# Altium PCB trd4.PcbDoc
Units mil, origin at the board's own origin, x right, y up, seen from the top; angles counter-clockwise.
Board outline 6000 x 4000 mil, 2 copper layers (Top Layer, Bottom Layer); 73 components, 143 nets, 481 pads, 96 vias.
Unrouted connection lines stored in the file: 173.
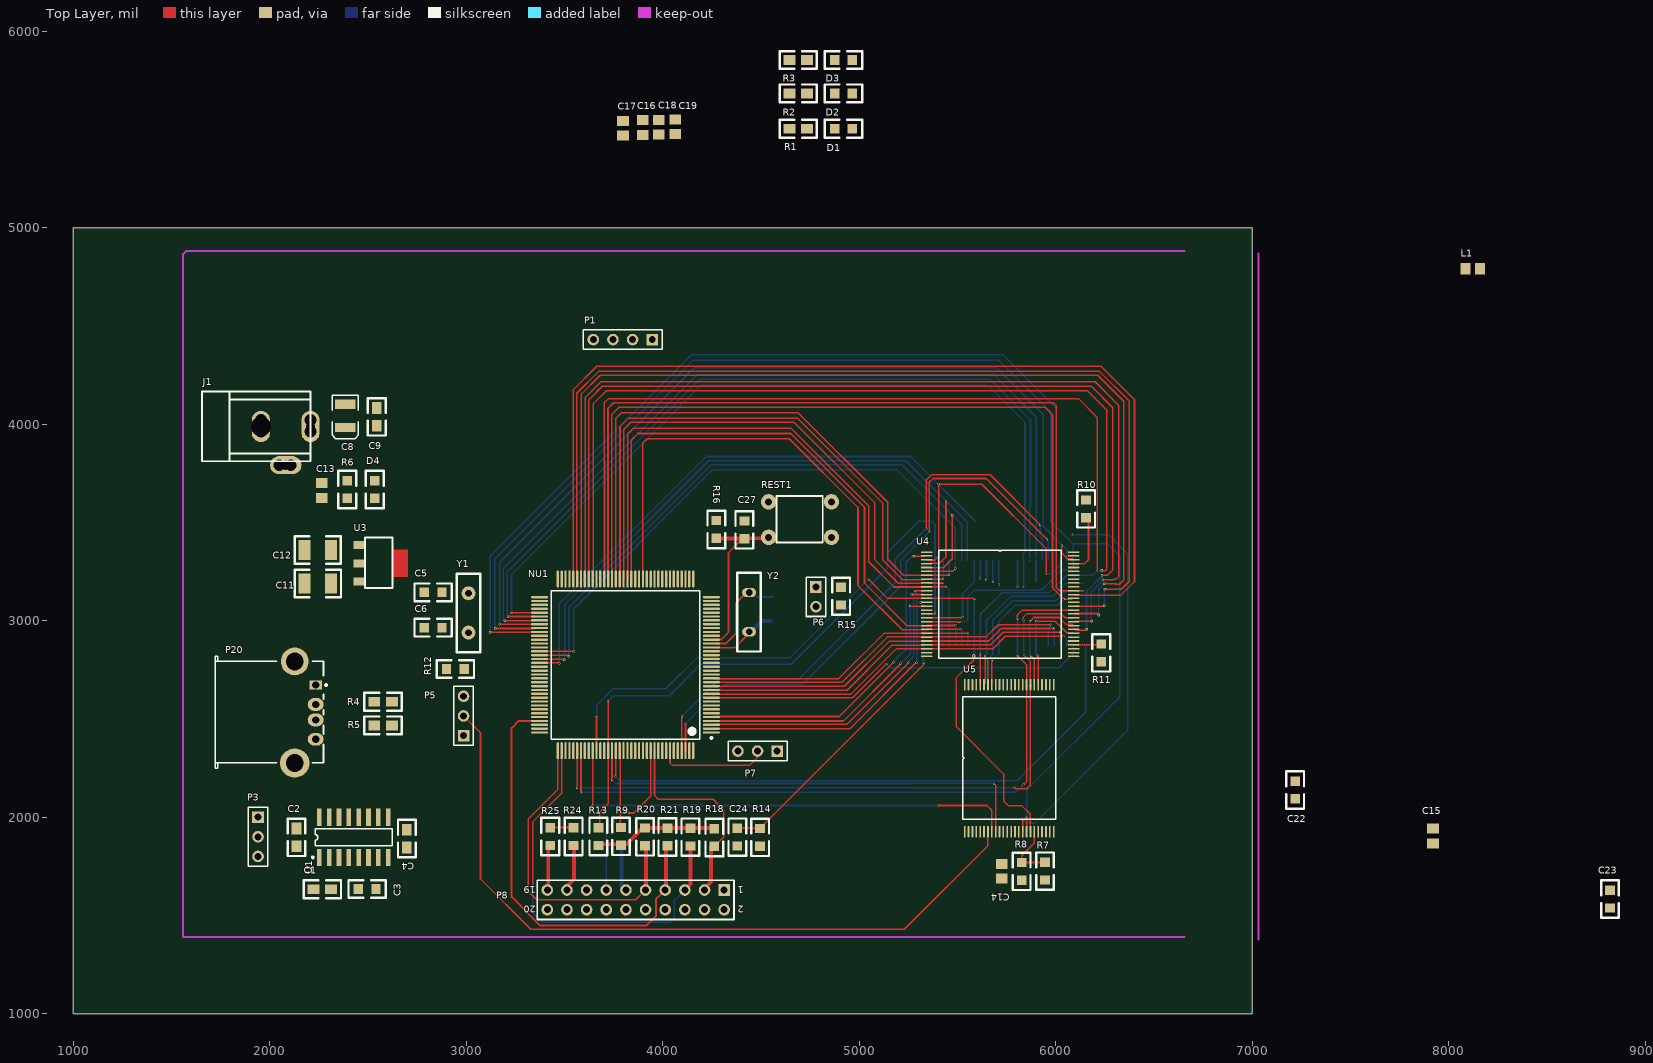
[diagram p0: Top Layer view]
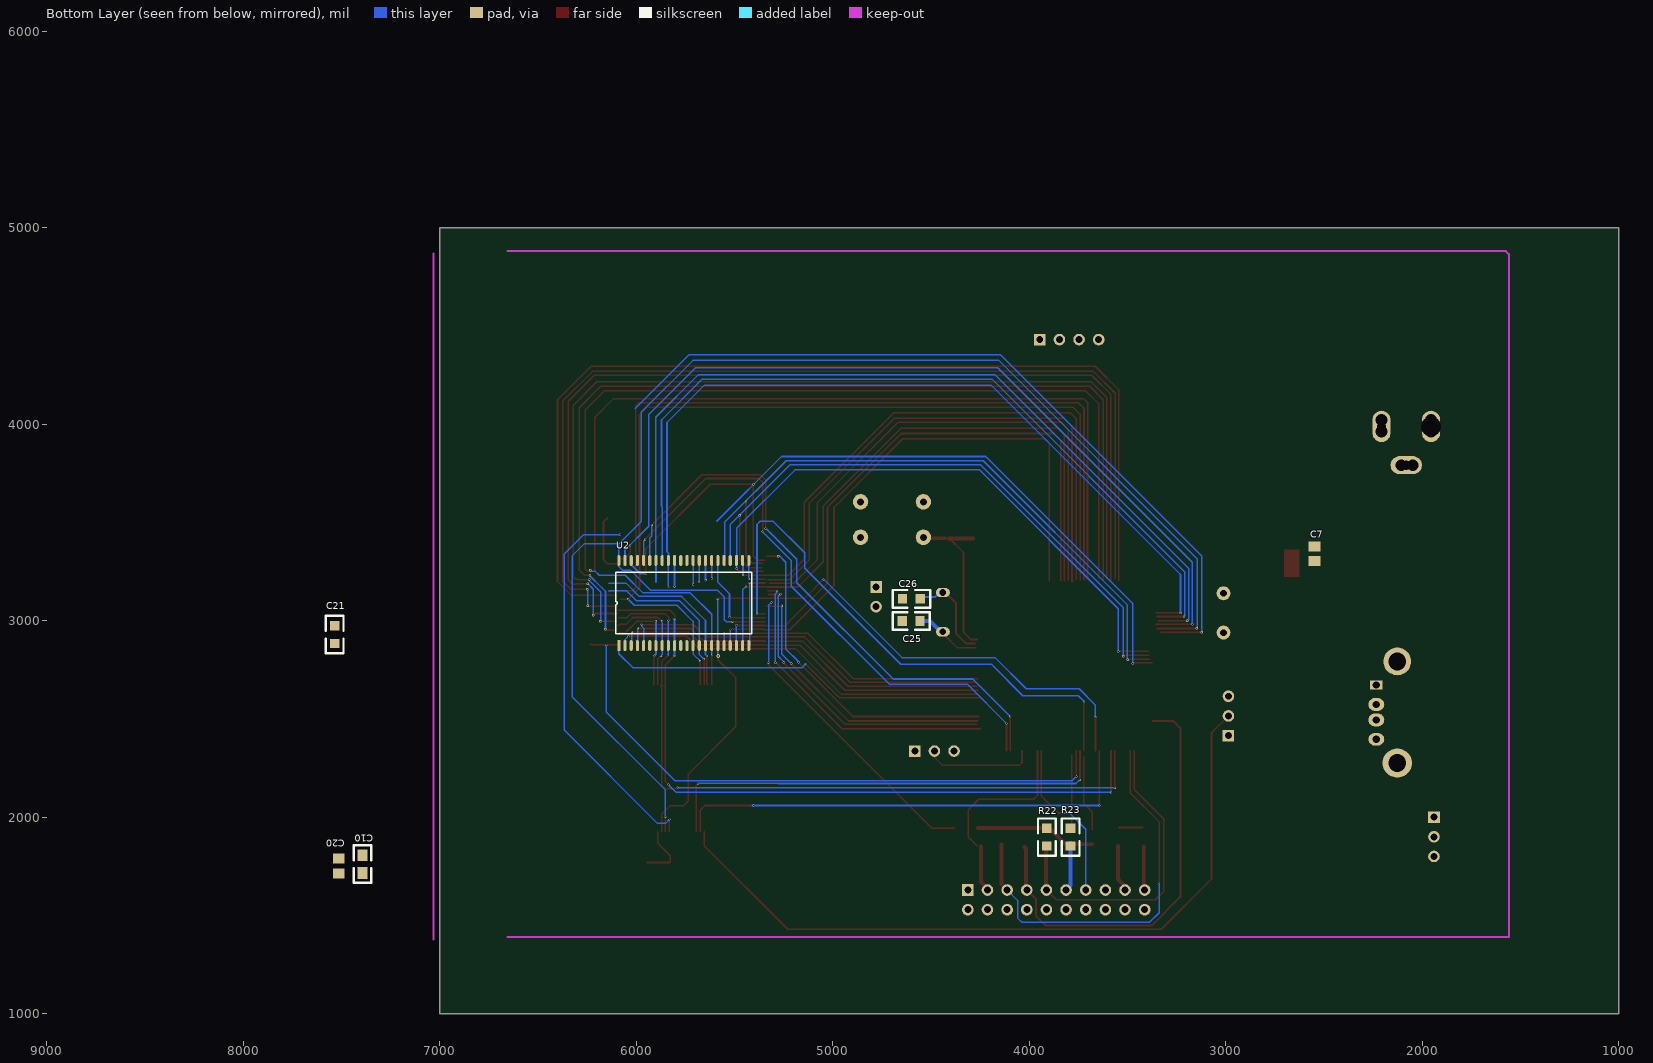
[diagram p1: Bottom Layer view, seen from below]

## Layer stack, top to bottom
Top Layer: signal copper 1.4
Dielectric: dielectric 12.6, FR-4, Dk 4.8
Bottom Layer: signal copper 1.4

## Board outline
1000,1000 7000,1000 7000,5000 1000,5000

## Design rules (kind name [scope] priority, off if disabled: settings)
Clearance [All] p1: gap=6
PolygonConnect [All] p1: connectstyle=Relief reliefconductorwidth=10 reliefentries=4 polygonreliefangle="90 Angle"
RoutingVias [All] p1: holewidth=28 width=50 viastyle="Through Hole" minholewidth=28 minwidth=50 maxholewidth=28 maxwidth=50
SilkscreenOverComponentPads [All] p1: minsilkscreentomaskgap=10
SolderMaskExpansion [All] p1: expansion=4
TestPointUsage [All] p1: valid=0 allowmultiple=FALSE
Testpoint [All] p1: side=15 testpointundercomponent=TRUE minsize=40 maxsize=100 preferedsize=60 minholesize=0 maxholesize=40 preferedholesize=32 testpointgrid=1 style=1023 order=0123456789
Width [All] p1: maxlimit=50 minlimit=6 preferedwidth=10 minimp=50.000000 maximp=50.000000 favimp=50.000000
23 further rules are at their usual default settings.

## Classes and differential pairs
net class R19_Nets: PA15 VDD33
net class U4_Nets: A0 A1 A2 A3 A4 A5 A6 A7 A8 A9 A10 A11 A12 A13 A14 A15 A16 A17 A18 A19 A20 A21 A22 D0 D1 D2 D3 D4 D5 D6 D7 D8 D9 D10 D11 D12 D13 D14 D15 GND NetC24_1 NetP6_2 NetR10_1 NetU4_1 NetU4_27 NetU4_28 NetU4_30 NetU4_55 NetU4_56 PD4 PD5 PD6 PG9 VDD33
net class D[0..15]: AD0 AD1 AD2 AD3 AD4 AD5 AD6 AD7 AD8 AD9 AD10 AD11 AD12 AD13 AD14 AD15 AD16 AD17 AD18 AD19 AD20 AD21 AD22 AD23 D0 D1 D2 D3 D4 D5 D6 D7 D8 D9 D10 D11 D12 D13 D14 D15 DATA0 DATA1 DATA2 DATA3 DATA4 DATA5 DATA6 DATA7 DATA8 DATA9 DATA10 DATA11 DATA12 DATA13 DATA14 DATA15 NetU4_1 NetU4_27 NetU4_28 NetU4_30 NetU4_55 NetU4_56
net class Y1_Nets: PB14 PB15
net class U5_Nets: A16 A17 D0 D1 D2 D3 D4 D5 D6 D7 GND NetP5_2 NetR7_1 PD4 PD5 PD7 VDD33
net class A[0..23]: A0 A1 A2 A3 A4 A5 A6 A7 A8 A9 A10 A11 A12 A13 A14 A15 A16 A17 A18 A19 A20 A21 A22 A23 NetU4_1 NetU4_27 NetU4_28 NetU4_30 NetU4_55 NetU4_56
net class U3_Nets: GND VDD5 VDD33
net class U2_Nets: A0 A1 A2 A3 A4 A5 A6 A7 A8 A9 A10 A11 A12 A13 A14 A15 A16 A17 A18 D0 D1 D2 D3 D4 D5 D6 D7 D8 D9 D10 D11 D12 D13 D14 D15 GND PD4 PD5 PE0 PE1 PG10 VDD33
net class REST1_Nets: GND NRST
net class R25_Nets: GND NetP8_19
net class R24_Nets: GND NetP8_17
net class R23_Nets: GND NetP8_11
net class R22_Nets: GND PA14
net class R21_Nets: PA13 VDD33
net class R20_Nets: PA14 VDD33
net class R18_Nets: PB4 VDD33
net class R16_Nets: NRST VDD33
net class R15_Nets: NetP6_2 VDD33
net class R14_Nets: NetC24_1 VDD33
net class R13_Nets: PD6 VDD33
net class R12_Nets: PG6 VDD33
net class R11_Nets: PG9 VDD33
net class R10_Nets: NetR10_1 VDD33
net class R9_Nets: PG10 VDD33
net class R8_Nets: NetR7_1 VDD33
net class R7_Nets: GND NetR7_1
net class R6_Nets: NetD4_1 VDD33
net class R5_Nets: NetP20_3 PA12
net class R4_Nets: NetP20_2 PA11
net class R3_Nets: LED2 NetD3_2
net class R2_Nets: LED1 NetD2_2
net class R1_Nets: LED0 NetD1_2
net class P20_Nets: GND NetP20_2 NetP20_3 NetP20_5 NetP20_6 "USB 5V"
net class P8_Nets: GND NetP8_11 NetP8_17 NetP8_19 NRST PA13 PA14 PA15 PB3 PB4 VDD33
net class P7_Nets: BOOT0 GND VDD33
net class P6_Nets: GND NetP6_2
net class P5_Nets: NetP5_2 PD6 PG6
net class P3_Nets: GND R1IN T1OUT
net class P1_Nets: PA5 PA6 PA7 PA8
net class NU1_Nets: A0 A1 A2 A3 A4 A5 A6 A7 A8 A9 A10 A11 A12 A13 A14 A15 A16 A17 A18 A19 A20 A21 A22 A23 BOOT0 D0 D1 D2 D3 D4 D5 D6 D7 D8 D9 D10 D11 D12 D13 D14 D15 GND LED0 LED1 LED2 NetL1_1 NetNU1_6 NetNU1_106 NRST OSCIN OSCOUT PA0 PA1 PA2 PA3 PA4 PA5 PA6 PA7 PA8 PA9 PA10 PA11 PA12 PA13 PA14 PA15 PB0 PB1 PB2 PB3 PB4 PB5 PB6 PB7 PB8 PB9 PB10 PB11 PB12 PB13 PB14 PB15 PC0 PC1 PC2 PC3 PC4 PC5 PC6 PC7 PC8 PC9 PC10 PC11 PC12 PC13 PC14 PC15 PD2 PD3 PD4 PD5 PD6 PD7 PE0 PE1 PF6 PF10 PF11 PG6 PG7 PG8 PG9 PG10 PG11 PG12 PG13 PG14 PG15 VDD33
net class L1_Nets: NetL1_1 VDD33
net class J1_Nets: GND VDD5
net class D4_Nets: GND NetD4_1
net class D3_Nets: NetD3_2 VDD33
net class D2_Nets: NetD2_2 VDD33
net class D1_Nets: NetD1_2 VDD33
net class C27_Nets: GND NRST
net class C25_Nets: GND OSCIN
net class C24_Nets: GND NetC24_1
net class C23_Nets: GND VDD33
net class C22_Nets: GND VDD33
net class C21_Nets: GND VDD33
net class C20_Nets: GND VDD33
net class C19_Nets: GND VDD33
net class C18_Nets: GND VDD33
net class C17_Nets: GND VDD33
net class C16_Nets: GND VDD33
net class C15_Nets: GND VDD33
net class C14_Nets: GND VDD33
net class C13_Nets: GND VDD5
net class C12_Nets: GND VDD33
net class C11_Nets: GND VDD5
net class C10_Nets: GND VDD33
net class C9_Nets: GND VDD5
net class C8_Nets: GND VDD5
net class C7_Nets: GND VDD33
net class C6_Nets: GND PB15
net class C5_Nets: GND PB14
net class C3_Nets: NetC3_1 NetC3_2
net class C1_Nets: NetC1_1 NetC1_2
component class "XLAT AND JTAG": C25 C26 C27 P7 P8 R16 R18 R19 R20 R21 R22 R23 R24 R25 REST1 Y2
component class STORAGE: C21 C22 C23 C24 P5 P6 R7 R8 R9 R10 R11 R12 R13 R14 R15 U2 U4 U5
component class POWER: C7 C8 C9 C10 C11 C12 C13 C14 C15 C16 C17 C18 C19 C20 D4 J1 L1 NU1 R6 U3
component class GPIO_OUT: C5 C6 Y1
component class EXTERN: 1 C1 C2 C3 C4 D1 D2 D3 P1 P3 P20 R1 R2 R3 R4 R5 U1
net class C2_Nets: NetC2_2 VDD5
net class C4_Nets: GND NetC4_1
net class U1_Nets: GND NetC1_1 NetC1_2 NetC2_2 NetC3_1 NetC3_2 NetC4_1 NetU1_7 NetU1_8 NetU1_9 NetU1_10 PA9 PA10 R1IN T1OUT VDD5
net class C26_Nets: GND OSCOUT
net class Y2_Nets: OSCIN OSCOUT

## Components (designator, comment, footprint, x,y, rotation, side; value= is the part's Value field where it differs from the comment)
C1 "0.1uF" 0805#1 2223,1633 r0 top
C2 "0.1uF" 0805#1 2137,1942 r270 top
C3 "0.1uF" 0805#2 2541,1634 r180 top
C4 "0.1uF" 0805#1 2698,1846 r90 top
C5 "Cap" 0805#2 2787,3144 r0 top
C6 "Cap" 0805#2 2787,2964 r0 top
C7 "Cap" 6-0805 2549,3340 r270 bottom
C8 "Cap Pol2" 3.5X2.8X1.9 2385,4042 r270 top
C9 "102" 0805#1 2545,4082 r270 top
C10 "102" 0805#1 7393,1806 r270 bottom
C11 "2.2uf" 1210 2313,3189 r180 top
C12 "2.2uf" 1210 2312,3359 r180 top
C13 "Cap" 6-0805 2265,3662 r90 top
C14 "Cap" 6-0805 5725,1725 r90 top
C15 "Cap" 6-0805 7920,1904 r90 top
C16 "Cap" 6-0805 3898,5509 r270 top
C17 "Cap" 6-0805 3798,5505 r270 top
C18 "Cap" 6-0805 3981,5511 r270 top
C19 "Cap" 6-0805 4065,5513 r270 top
C20 "Cap" 6-0805 7514,1751 r90 bottom
C21 "Cap" 0805#2 7535,2974 r270 bottom
C22 "Cap" 0805#2 7219,2183 r270 top
C23 "Cap" 0805#2 8821,1628 r270 top
C24 "Cap" 0805#2 4380,1943 r270 top
C25 "Cap" 0805#2 4646,2998 r180 bottom
C26 "Cap" 0805#2 4645,3111 r180 bottom
C27 "Cap" 0805#2 4416,3507 r270 top
D1 "LED0" 0805#2 4965,5503 r180 top
D2 "LED0" 0805#2 4965,5683 r180 top
D3 "LED0" 0805#2 4965,5853 r180 top
D4 "LED3" 0805#2 2535,3712 r270 top
J1 "PWR2.5" Power_In 1938,4078 r0 top
L1 "Inductor" 6-0805 8122,4790 r0 top
NU1 "STM32F103ZET6" LQFN144 3811,2775 r180 top
P1 "Header 4" HDR1X4 3947,4430 r180 top
P3 "Header 3" HDR1X3 1941,2000 r270 top
P5 "Header 3" HDR1X3 2987,2415 r90 top
P6 "Header 2" HDR1X2 4780,3171 r270 top
P7 "Header 3" HDR1X3 4583,2336 r180 top
P8 "Header 10X2" HDR2X10 4313,1629 r180 top
P20 "P10" 787616 1723,2534 r180 top
R1 "Res2" 0805#1 4645,5503 r0 top
R2 "Res2" 0805#1 4645,5683 r0 top
R3 "Res2" 0805#1 4645,5853 r0 top
R4 "Res2" 0805#1 2532,2587 r0 top
R5 "Res2" 0805#1 2532,2467 r0 top
R6 "Res2" 0805#2 2395,3712 r270 top
R7 "Res2" 0805#2 5946,1770 r270 top
R8 "Res2" 0805#2 5827,1679 r90 top
R9 "Res2" 0805#2 3788,1947 r270 top
R10 "Res2" 0805#2 6155,3524 r90 top
R11 "Res2" 0805#2 6232,2881 r270 top
R12 "Res2" 0805#2 2990,2754 r180 top
R13 "Res2" 0805#2 3673,1856 r90 top
R14 "Res2" 0805#2 4496,1852 r90 top
R15 "Res2" 0805#2 4908,3169 r270 top
R16 "Res2" 0805#2 4273,3419 r90 top
R18 "Res2" 0805#2 4263,1851 r90 top
R19 "Res2" 0805#2 4141,1853 r90 top
R20 "Res2" 0805#2 3910,1855 r90 top
R21 "Res2" 0805#2 4024,1854 r90 top
R22 "Res2" 0805#2 3911,1853 r90 bottom
R23 "Res2" 0805#2 3790,1853 r90 bottom
R24 "Res2" 0805#2 3547,1856 r90 top
R25 "Res2" 0805#2 3428,1856 r90 top
REST1 "SW_PB" SWPB 4859,3604 r0 top
U1 "MAX232-2" SOIC16 2428,1897 r0 top
U2 "IS61LV51216-10T" TSOP44 6089,2873 r90 bottom
U3 "LM1117-3.3" SOT-223 2625,3422 r270 top
U4 "M29W128GL" TSOP56 5343,3349 r0 top
U5 "NAND512W3A2CN6E" TSOP48 5537,1926 r90 top
Y1 "XTAL" XTAL-1#1 3012,2939 r90 top
Y2 "XTAL" XTAL-1#2 4440,3143 r270 top

## Footprints (in the part's own frame and the unit in brackets; to place one, negate y for a bottom-side part, rotate by r counter-clockwise, add the part's x,y. Pads: shape width x height; smd on the part's side, far side on the other; paste and mask are expansions set on the pad)
3.5X2.8X1.9 [mm] "SM LED; 2 C-Bend Leads; Body 3.5 x 2.8 x 1.9 mm, inc leads (LxWxH typ)"
  rect 1.203x2.6 smd: 1(-1.5,0) 2(1.5,0)
  silkscreen extent -2.65,-1.7 2.95,1.7
6-0805 [mm] "Chip Resistor; Body 2.0 x 1.3 mm (LxW typ)"
  rect 1.3x1.5 smd: 1(-0.95,0) 2(0.95,0)
0805#1 [mil]
  rect 60x50 smd: 1(0,0) 2(90,0)
  silkscreen extent -50,-45 140,45
0805#2 [mil]
  rect 47.37x50 smd: 1(0,0) 2(90,0)
  silkscreen extent -50,-45 140,45
1210 [mil]
  rect 60x100 smd: 1(0,0) 2(135,0)
  silkscreen extent -50,-70 185,70
787616 [mm] "Connector; USB1.1, Type A, Thru-Hole; 4 Position; Right Angle"
  rect 1.606x1.2 hole 0.92: 1(-12.99,-3.5)
  oval 2.057x1.676 hole 0.92: 2(-12.99,-1) 3(-12.99,1)
  oval 2.057x1.6 hole 0.92: 4(-12.99,3.5)
  round 3.8 hole 2.3: 5(-10.28,6.57)
  round 3.6 hole 2.3: 6(-10.28,-6.57)
  silkscreen extent -14.47,-7.25 0,7.25
HDR1X2 [mm] "Connector; Header; 2 Position"
  rect 1.5x1.5 hole 0.9: 1(0,0)
  round 1.5 hole 0.9: 2(2.54,0)
  silkscreen extent -1.27,-1.27 3.81,1.27
HDR1X3 [mm] "Connector; Header; 3 Position"
  rect 1.5x1.5 hole 0.9: 1(0,0)
  round 1.5 hole 0.9: 2(2.54,0) 3(5.08,0)
  silkscreen extent -1.27,-1.27 6.35,1.27
HDR1X4 [mm] "Connector; Header; 4 Position"
  rect 1.5x1.5 hole 0.9: 1(0,0)
  round 1.5 hole 0.9: 2(2.54,0) 3(5.08,0) 4(7.62,0)
  silkscreen extent -1.27,-1.27 8.89,1.27
HDR2X10 [mm] "Connector; Header; 10x2 Position"
  rect 1.5x1.5 hole 0.9: 1(0,0)
  round 1.5 hole 0.9: 2(0,2.54) 3(2.54,0) 4(2.54,2.54) 5(5.08,0) 6(5.08,2.54) 7(7.62,0) 8(7.62,2.54) 9(10.16,0) 10(10.16,2.54) 11(12.7,0) 12(12.7,2.54) 13(15.24,0) 14(15.24,2.54) 15(17.78,0) 16(17.78,2.54) 17(20.32,0) 18(20.32,2.54) 19(22.86,0) 20(22.86,2.54)
  silkscreen extent -1.27,-1.27 24.13,3.81
LQFN144 [mm] "TSQFP, 144-Leads, Body 23.8x23.8mm (max), Pitch 0.50mm, IPC Medium Density"
  oval 2.2x0.3 smd: 1(-11.1,8.75) 2(-11.1,8.25) 3(-11.1,7.75) 4(-11.1,7.25) 5(-11.1,6.75) 6(-11.1,6.25) 7(-11.1,5.75) 8(-11.1,5.25) 9(-11.1,4.75) 10(-11.1,4.25) 11(-11.1,3.75) 12(-11.1,3.25) 13(-11.1,2.75) 14(-11.1,2.25) 15(-11.1,1.75) 16(-11.1,1.25) 17(-11.1,0.75) 18(-11.1,0.25) 19(-11.1,-0.25) 20(-11.1,-0.75) 21(-11.1,-1.25) 22(-11.1,-1.75) 23(-11.1,-2.25) 24(-11.1,-2.75) 25(-11.1,-3.25) 26(-11.1,-3.75) 27(-11.1,-4.25) 28(-11.1,-4.75) 29(-11.1,-5.25) 30(-11.1,-5.75) 31(-11.1,-6.25) 32(-11.1,-6.75) 33(-11.1,-7.25) 34(-11.1,-7.75) 35(-11.1,-8.25) 36(-11.1,-8.75) 73(11.1,-8.75) 74(11.1,-8.25) 75(11.1,-7.75) 76(11.1,-7.25) 77(11.1,-6.75) 78(11.1,-6.25) 79(11.1,-5.75) 80(11.1,-5.25) 81(11.1,-4.75) 82(11.1,-4.25) 83(11.1,-3.75) 84(11.1,-3.25) 85(11.1,-2.75) 86(11.1,-2.25) 87(11.1,-1.75) 88(11.1,-1.25) 89(11.1,-0.75) 90(11.1,-0.25) 91(11.1,0.25) 92(11.1,0.75) 93(11.1,1.25) 94(11.1,1.75) 95(11.1,2.25) 96(11.1,2.75) 97(11.1,3.25) 98(11.1,3.75) 99(11.1,4.25) 100(11.1,4.75) 101(11.1,5.25) 102(11.1,5.75) 103(11.1,6.25) 104(11.1,6.75) 105(11.1,7.25) 106(11.1,7.75) 107(11.1,8.25) 108(11.1,8.75)
  oval 0.3x2.2 smd: 37(-8.75,-11.1) 38(-8.25,-11.1) 39(-7.75,-11.1) 40(-7.25,-11.1) 41(-6.75,-11.1) 42(-6.25,-11.1) 43(-5.75,-11.1) 44(-5.25,-11.1) 45(-4.75,-11.1) 46(-4.25,-11.1) 47(-3.75,-11.1) 48(-3.25,-11.1) 49(-2.75,-11.1) 50(-2.25,-11.1) 51(-1.75,-11.1) 52(-1.25,-11.1) 53(-0.75,-11.1) 54(-0.25,-11.1) 55(0.25,-11.1) 56(0.75,-11.1) 57(1.25,-11.1) 58(1.75,-11.1) 59(2.25,-11.1) 60(2.75,-11.1) 61(3.25,-11.1) 62(3.75,-11.1) 63(4.25,-11.1) 64(4.75,-11.1) 65(5.25,-11.1) 66(5.75,-11.1) 67(6.25,-11.1) 68(6.75,-11.1) 69(7.25,-11.1) 70(7.75,-11.1) 71(8.25,-11.1) 72(8.75,-11.1) 109(8.75,11.1) 110(8.25,11.1) 111(7.75,11.1) 112(7.25,11.1) 113(6.75,11.1) 114(6.25,11.1) 115(5.75,11.1) 116(5.25,11.1) 117(4.75,11.1) 118(4.25,11.1) 119(3.75,11.1) 120(3.25,11.1) 121(2.75,11.1) 122(2.25,11.1) 123(1.75,11.1) 124(1.25,11.1) 125(0.75,11.1) 126(0.25,11.1) 127(-0.25,11.1) 128(-0.75,11.1) 129(-1.25,11.1) 130(-1.75,11.1) 131(-2.25,11.1) 132(-2.75,11.1) 133(-3.25,11.1) 134(-3.75,11.1) 135(-4.25,11.1) 136(-4.75,11.1) 137(-5.25,11.1) 138(-5.75,11.1) 139(-6.25,11.1) 140(-6.75,11.1) 141(-7.25,11.1) 142(-7.75,11.1) 143(-8.25,11.1) 144(-8.75,11.1)
  silkscreen extent -11.23,-9.6 9.6,9.6, body extent -10,-10 10,10, height 1.6
Power_In [mil]
  rect 60x60 hole 60: 1(270,-116) 2(170,-287) 3(18,-57)
  oval 92x160 hole 47: 1(270,-90)
  rect 50x60 hole 60: 1(270,-57) 3(18,-116)
  rect 60x50 hole 60: 2(111,-287)
  oval 160x92 hole 47: 2(144,-287)
  oval 92x160 hole 100: 3(18,-90)
  silkscreen extent -281,-267 270,87
SOIC16 [mm]
  rect 0.6x2.2 smd: 1(-4.445,-2.6) 2(-3.175,-2.6) 3(-1.905,-2.6) 4(-0.635,-2.6) 5(0.635,-2.6) 6(1.905,-2.6) 7(3.175,-2.6) 8(4.445,-2.6) 9(4.445,2.6) 10(3.175,2.6) 11(1.905,2.6) 12(0.635,2.6) 13(-0.635,2.6) 14(-1.905,2.6) 15(-3.175,2.6) 16(-4.445,2.6)
  silkscreen extent -5.42,-2.72 5,1.1
SOT-223 [mm]
  rect 1x1.5 smd: 1(0.95,-4.31) 2(3.35,-4.31) 3(5.65,-4.31)
  Top Layer region: 1.524,0 5.08,0 5.08,2.032 1.524,2.032
  silkscreen extent 0,-3.56 6.5,0
SWPB [mm]
  round 2 hole 0.9: 1(-8.128,0) 2(-8.128,-4.572) 3(0,-4.572) 4(0,0)
  silkscreen extent -7.13,-5.25 -1.13,0.75
TSOP44 [mm]
  rect 1.4x0.4 smd: 1(0,0)
  oval 1.4x0.4 smd: 2(0,-0.8) 3(0,-1.6) 4(0,-2.4) 5(0,-3.2) 6(0,-4) 7(0,-4.8) 8(0,-5.6) 9(0,-6.4) 10(0,-7.2) 11(0,-8) 12(0,-8.8) 13(0,-9.6) 14(0,-10.4) 15(0,-11.2) 16(0,-12) 17(0,-12.8) 18(0,-13.6) 19(0,-14.4) 20(0,-15.2) 21(0,-16) 22(0,-16.8) 23(11,-16.8) 24(11,-16) 25(11,-15.2) 26(11,-14.4) 27(11,-13.6) 28(11,-12.8) 29(11,-12) 30(11,-11.2) 31(11,-10.4) 32(11,-9.6) 33(11,-8.8) 34(11,-8) 35(11,-7.2) 36(11,-6.4) 37(11,-5.6) 38(11,-4.8) 39(11,-4) 40(11,-3.2) 41(11,-2.4) 42(11,-1.6) 43(11,-0.8) 44(11,0)
  silkscreen extent 1.53,-17.2 9.47,0.4
TSOP48 [mm]
  rect 1.5x0.22 smd: 1(0,0)
  oval 1.5x0.22 smd: 2(0,-0.5) 3(0,-1) 4(0,-1.5) 5(0,-2) 6(0,-2.5) 7(0,-3) 8(0,-3.5) 9(0,-4) 10(0,-4.5) 11(0,-5) 12(0,-5.5) 13(0,-6) 14(0,-6.5) 15(0,-7) 16(0,-7.5) 17(0,-8) 18(0,-8.5) 19(0,-9) 20(0,-9.5) 21(0,-10) 22(0,-10.5) 23(0,-11) 24(0,-11.5) 25(19,-11.5) 26(19,-11) 27(19,-10.5) 28(19,-10) 29(19,-9.5) 30(19,-9) 31(19,-8.5) 32(19,-8) 33(19,-7.5) 34(19,-7) 35(19,-6.5) 36(19,-6) 37(19,-5.5) 38(19,-5) 39(19,-4.5) 40(19,-4) 41(19,-3.5) 42(19,-3) 43(19,-2.5) 44(19,-2) 45(19,-1.5) 46(19,-1) 47(19,-0.5) 48(19,0)
  silkscreen extent 1.58,-11.75 17.42,0.25
TSOP56 [mm]
  rect 1.5x0.2 smd: 1(0,0)
  oval 1.5x0.2 smd: 2(0,-0.5) 3(0,-1) 4(0,-1.5) 5(0,-2) 6(0,-2.5) 7(0,-3) 8(0,-3.5) 9(0,-4) 10(0,-4.5) 11(0,-5) 12(0,-5.5) 13(0,-6) 14(0,-6.5) 15(0,-7) 16(0,-7.5) 17(0,-8) 18(0,-8.5) 19(0,-9) 20(0,-9.5) 21(0,-10) 22(0,-10.5) 23(0,-11) 24(0,-11.5) 25(0,-12) 26(0,-12.5) 27(0,-13) 28(0,-13.5) 29(19,-13.5) 30(19,-13) 31(19,-12.5) 32(19,-12) 33(19,-11.5) 34(19,-11) 35(19,-10.5) 36(19,-10) 37(19,-9.5) 38(19,-9) 39(19,-8.5) 40(19,-8) 41(19,-7.5) 42(19,-7) 43(19,-6.5) 44(19,-6) 45(19,-5.5) 46(19,-5) 47(19,-4.5) 48(19,-4) 49(19,-3.5) 50(19,-3) 51(19,-2.5) 52(19,-2) 53(19,-1.5) 54(19,-1) 55(19,-0.5) 56(19,0)
  silkscreen extent 1.58,-13.75 17.42,0.25
XTAL-1#1 [mm]
  round 1.8 hole 0.85: 1(0,0) 2(5.08,0)
  silkscreen extent -2.54,-1.52 7.62,1.52
XTAL-1#2 [mm]
  oval 1.203x1.8 hole 0.85: 1(0,0) 2(5.08,0)
  silkscreen extent -2.54,-1.52 7.62,1.52

## Part data
C1 C2 C3 C4 C9 C10 C11 C12: library part CAP, "Capacitor"
C5 C6 C7 C13 C14 C15 C16 C17 C18 C19 C20 C21 C22 C23 C24 C25 C26 C27: "Capacitor"
C8: "Polarized Capacitor (Axial)"
D1 D2 D3: "Typical INFRARED GaAs LED"
D4: "Typical BLUE SiC LED"
J1: "Low Voltage Power Supply Connector"
P1: "Header, 4-Pin"
P3 P5 P7: "Header, 3-Pin"
P6: "Header, 2-Pin"
P8: "Header, 10-Pin, Dual row"
P20: library part COMPONENT_1
R1 R2 R3 R4 R5 R6 R7 R8 R9 R10 R11 R12 R13 R14 R15 R16 R18 R19 R20 R21 R22 R23 R24 R25: "Resistor"
U1: library part MAX3232-2
Y1 Y2: "Crystal Oscillator"

## Via types
v1: diameter 10, hole 7, Top Layer to Bottom Layer, 64 vias
v2: diameter 12, hole 7, Top Layer to Bottom Layer, 31 vias
v3: diameter 19.68, hole 10, Top Layer to Bottom Layer, 1 vias

## Nets (pads, with @x,y where several pads share a name; then routed paths per layer and width w, separated by ;. In a path a pad name is that pad's centre, name@x,y a point inside that pad or via, vN(x,y) a via of type N, cw(c..) or ccw(c..) an arc to the next point about the centre after c; other vN are vias at no path point)
A0: NU1.10 U2.1 U4.31 | length 1990.2
  Top Layer w8: NU1.10 4965.68,2607.68 5136,2778 v1@5136,2780
  Bottom Layer w8: v1(5138,2779) 5157,2760 6017,2760 6089,2832 U2.1
A1: NU1.11 U2.2 U4.26 | length 1973.7
  Top Layer w8: NU1.11@4271,2626 4958,2626 5188,2856 U4.26@5371,2856 ; U4.26 5680.88,2856.88 5744,2920 v1@6040,2920
  Bottom Layer w8: v1(6040,2921) 6057.5,2903.5 U2.2
A2: NU1.12 U2.3 U4.25 | length 1945.1
  Top Layer w8: NU1.12@4261,2646 4939,2646 5167,2874 U4.25@5337,2874 ; U4.25 5668.56,2876.56 5733,2941 v1@6024,2941
  Bottom Layer w8: U2.3@6023,2876.01 v1(6023,2943)
A3: NU1.13 U2.4 U4.24 | length 1925.2
  Top Layer w8: NU1.13@4262,2666 4924,2666 5154,2896 U4.24@5329,2896 ; U4.24 5659.24,2896.24 5723,2960 v1@5992,2960
  Bottom Layer w8: U2.4@5992,2875.51 v1(5992,2963)
A4: NU1.14 U2.5 U4.23 | length 1934.5
  Top Layer w8: NU1.14@4272,2686 4913,2686 5144,2917 5646,2917 5708,2979 v1@5973,2979
  Bottom Layer w8: U2.5 5963.02,2962.02 5973,2972 v1(5973,2981)
A5: NU1.15 U2.18 U4.22 | length 1442.1
  Top Layer w8: NU1.15@4263,2705 4896,2705 5126,2935 U4.22@5339,2935 ; U4.22 v1@5552.39,2935.61
  Bottom Layer w8: U2.18 v1@5553.57,2934.43
  other v1: 5554,2934
A6: NU1.50 U2.19 U4.21 | length 3058.9
  Top Layer w8: NU1.50@3898,3202 3898,3903 3921,3926 4644,3926 4994,3576 4994,3178 5219,2953 U4.21@5352,2953 ; U4.21 v1@5520.3,2955.3
  Bottom Layer w8: U2.19 v1@5522.07,2953.93
  other v1: 5521,2956
A7: NU1.53 U2.20 U4.20 | length 3129.7
  Top Layer w8: 3840,3736 3840,3918 3874,3952 4652,3952 5027,3577 5027,3191 5244,2974 U4.20@5359,2974 ; NU1.53@3841,3204 3841,3740 ; U4.20 v1@5487.98,2974.99
  Bottom Layer w8: U2.20 v1@5490.57,2975.43
  other v1: 5490,2977
A8: NU1.54 U2.21 U4.10 | length 3180.9
  Top Layer w8: NU1.54@3822,3203 3822,3949 3851,3978 4654,3978 5049,3583 5049,3299 5177,3171 U4.10@5335,3171 ; U4.10 v1@5444.16,3171.84
  Bottom Layer w8: v1(5442,3174) 5459.08,3156.92 U2.21
A9: NU1.55 U2.22 U4.9 | length 3210.3
  Top Layer w8: NU1.55@3802,3205 3802,3973 3838,4009 4669,4009 5080,3598 5080,3309 5199,3190 U4.9@5324,3190 ; U4.9 v1@5425.48,3191.52
  Bottom Layer w8: U2.22@5423,2877.58 v1(5423,3192)
A10: NU1.56 U2.23 U4.8 | length 3040.7
  Top Layer w8: NU1.56@3783,3197 3783,3988 3824,4029 4688,4029 5121,3596 5121,3307 5219,3209 U4.8@5330,3209 ; U4.8 5425.2,3211.2 v1@5426,3212
  Bottom Layer w8: v1(5427,3212) U2.23@5427,3305.49
A11: NU1.57 U2.24 U4.7 | length 3113.4
  Top Layer w8: NU1.57@3761,3210 3761,4028 3791,4058 4689,4058 5145,3602 5145,3312 5227,3230 U4.7@5346,3230 ; U4.7 v1@5456.11,3230.89
  Bottom Layer w8: v1(5457,3232) U2.24@5457,3303.99
A12: NU1.87 U2.25 U4.6 | length 3059.6
  Top Layer w8: NU1.87@3392,2843 v2@3545,2843 ; U4.6@5352,3251 5478,3251 v2@5488,3261
  Bottom Layer w8: v2(3547,2843) 3547,3061 4253,3767 5193,3767 5489,3471 U2.25@5489,3309 ; U2.25@5490,3297 5490,3269 v2@5491,3268
  other v2: 5489,3265
A13: NU1.88 U2.26 U4.5 | length 3338.2
  Top Layer w8: NU1.88@3391,2823 v2@3522,2823 ; U4.5@5363,3269 5428,3269 5474,3315 v2@5474,3535
  Bottom Layer w8: v2(3523,2819) 3523,3068 4248,3793 5218,3793 5522.07,3488.93 U2.26
  other v2: 5474,3537
A14: NU1.89 U2.27 U4.4 | length 3451.2
  Top Layer w8: NU1.89@3388,2803 v2@3498,2803 ; U4.4@5356,3291 5408,3291 5442,3325 v2@5442,3607
  Bottom Layer w8: v2@3501,2800 3501,3080 4235,3814 5237,3814 5551,3500 U2.27@5551,3305
  other v2: 3499,2801 5442,3606
A15: NU1.90 U2.42 U4.3 | length 4330.9
  Top Layer w8: NU1.90 v2@3472.84,2784.84 ; U4.3@5347,3307 5383,3307 5404,3328 v2(5404,3694) ; v2@5404,3696 v2(5404,3694) ; v1@5953,3238 5953,3365 5624,3694 v2(5404,3694)
  Bottom Layer w8: v2@3473,2780 3473,3086 4222,3835 5261,3835 5591,3505 ; v1(5952,3238) 5980,3238 6026.01,3284.01 U2.42
  other v2: 3474,2782
A16: NU1.80 U2.43 U4.54 U5.16 | length 6703.5
  Top Layer w8: v2(3170,2981) NU1.80@3357,2981 ; U5.16 v1@5832.27,1984.72 ; v1(6031,3383) 6031,3344.05 6059.67,3315.38 6085.28,3315.38 U4.54
  Bottom Layer w8: v2@3171,2983 3171,3297 4161,4287 5699,4287 5937,4049 5937,3517 5937,3480 6057.5,3359.5 U2.43 ; v1(5831,1989) 5852,1968 5892,1968 6367,2443 6367,3339 6269,3437 v1@6082,3437
  other v1: 6082,3438
A17: NU1.81 U2.44 U4.19 U5.17 | length 7534.5
  Top Layer w8: v2@3147,2960 NU1.81@3348,2960 ; U4.19 5507.67,2994.67 v1@5509,2996 ; U5.17 v1@5851.96,1999.04
  Bottom Layer w8: v2@3145,2963 3145,3314 4155,4324 5712,4324 5975,4061 5975,3504 6089,3390 ; v1(5510,2994) 5541,2994 5552,3005 5552,3120 5587,3155 5928,3155 6030,3257 6071,3257 6089,3275 U2.44 6089,3390 ; v1(5852,2001) 5852,2138 6327,2613 6327,3329 6264,3392 6091,3392 6089,3390
  other v2: 3149,2961
A18: NU1.82 U2.28 U4.18 | length 4515.2
  Top Layer w8: v2@3121,2941 NU1.82@3332,2941 ; U4.18 v1@5527.65,3014.36
  Bottom Layer w8: v2@3122,2943 3122,3328 4147,4353 5732,4353 6006,4079 ; v1(5526,3018) 5526,3137 5585.06,3196.06 U2.28
  other v2: 3123,2941
A19: NU1.2 U4.11 | length 1593.8
  Top Layer w8: NU1.2 4953.2,2450.2 v2@5288,2785 ; v2(5284,3151) U4.11@5331,3151
  Bottom Layer w8: v2@5282,3147 5292,3137 v2@5292,2783
  other v2: 5292,2785
A20: NU1.3 U4.12 | length 1532
  Top Layer w8: NU1.3@4269,2473 4938,2473 v2@5252,2787 ; v2@5271,3133 U4.12@5326,3133
  Bottom Layer w8: v2@5249,2789 5278,2818 5278,3124 v2@5266,3136
  other v2: 5250,2787 5266,3134
A21: NU1.4 U4.15 | length 1458.1
  Top Layer w8: NU1.4@4264,2489 4920,2489 v2@5214,2783 ; 5265,3073 U4.15@5335,3073
  Bottom Layer w8: v2@5210,2780 5259,2829 v2(5259,3076)
  other v2: 5211,2782
A22: NU1.5 U4.2 | length 1674.9
  Top Layer w8: NU1.5@4257,2512 4899,2512 v2(5175,2788) ; v2(5277,3328) U4.2@5337,3328
  Bottom Layer w8: v2@5174,2790 5239,2855 5239,3297 5272,3330 v2@5274,3330
A23: NU1.1
BOOT0: NU1.138 P7.2 | length 560.5
  Top Layer w8: NU1.138 4037.38,2275.62 4048,2265 4444,2265 4483,2304 P7.2
D0: U2.7 U4.35 U5.29 | length 541
  Top Layer w8: v1@5902,2996 5998,2996 6056,2938 6088.65,2938 U4.35 ; v1@5906,2821 5911.02,2815.99 U5.29
  Bottom Layer w8: v1@5900.02,2997.02 U2.7 5900.02,2828.98 v1(5907,2822)
  other v1: 5901,2997
D1: U2.8 U4.37 U5.30 | length 577
  Top Layer w8: v1(5869,2997) 5888,3016 6017,3016 6052.27,2980.73 6085.28,2980.73 U4.37 ; v1@5877,2819 5891.33,2804.67 U5.30
  Bottom Layer w8: v1@5868.53,2997.53 U2.8 5868.53,2827.47 v1(5875,2821)
D2: NU1.114 U2.9 U4.39 U5.31 | length 3653.6
  Top Layer w8: v1@3564.94,2148.06 NU1.114 ; v1(5791,2150) 5797,2144 5853,2144 5871.65,2162.64 U5.31 ; v1@5840,3001 5834,3007 5834,3016 5852,3034 6029,3034 6048.65,3014.36 U4.39 ; v1@5841,2822 5871.65,2791.36 U5.31 ; 5877,2668.68 U5.31
  Bottom Layer w8: v1(3565,2149) v1@5791,2149 ; v1@5837.03,2824.97 U2.9 v1@5837.03,3002.03
  other v1: 5840,2822 5836,3001
D3: NU1.115 U2.10 U4.41 U5.32 | length 3675.9
  Top Layer w8: v1@3584.62,2125.38 NU1.115 ; v1(5805,3009) 5805,3029 5829.73,3053.72 U4.41 ; v1@5807,2821 5807,2820 5851.96,2775.04 U5.32 ; v1(5836,2165) 5851.96,2180.96 U5.32 ; 5857.31,2668.68 U5.32
  Bottom Layer w8: v1(3584,2126) 5798,2126 v1@5837,2165 ; v1@5805.54,2820.46 U2.10 v1@5805.54,3009.54
  other v1: 5806,2820
D4: NU1.58 U2.13 U4.44 U5.41 | length 4839.7
  Top Layer w8: NU1.58@3742,3206 3742,4050 3777,4085 5947,4085 5984,4048 5984,3978 ; U5.41 v1@5674.8,2795.8 ; 5984,3982 5984,3978 ; 6082,3108 6043,3108 v1(6042,3109) 5984,3167 5984,3978
  Bottom Layer w8: v1(5675,2794) 5711.05,2830.05 U2.13 5711.05,2996.05 5793,3078 6010,3078 6041,3109 v1(6042,3109)
D5: NU1.59 U2.14 U4.46 U5.42 | length 5081.7
  Top Layer w8: NU1.59@3722,3208 3722,4080 3751,4109 5988,4109 6002,4095 6002,3170 6020,3152 U4.46@6073,3152 ; U5.42 v1@5655.11,2801.11 ; U4.46 v1@6138.85,3152.15
  Bottom Layer w8: v1@5660,2804 v1(5656,2804) 5679.55,2827.55 U2.14 5679.55,3000.55 5779,3100 5998,3100 6050,3152 v1(6139,3152) v1@6140,3152
D6: NU1.60 U2.15 U4.48 U5.43 | length 5142.4
  Top Layer w8: 3702,3813 3702,4108 3724,4130 6116,4130 6212,4034 6212,3253 ; NU1.60@3704,3213 3704,3819 ; U5.43 5640.78,2679.39 v1@5640.78,2819.78
  Bottom Layer w8: v1(5641,2820) 5648.05,2827.05 U2.15 5648.05,3001.05 5770,3123 5985,3123 6053,3191 6139,3191
D7: NU1.63 U2.16 U4.50 U5.44 | length 5479
  Top Layer w8: NU1.63@3646,3214 3646,4102 3714,4170 6162,4170 6259,4073 6259,3260 6253,3254 v2@6235,3254 ; U5.44 v1@5615.74,2829.74 ; U4.50@6089.14,3229 U4.50
  Bottom Layer w8: v1@5616.56,2830.56 U2.16 ; U2.16@5618,2873 U2.16 ; v2@6234,3252 6210,3252 6189,3231 6056,3231 5966,3141 5725,3141 5616.56,3032.56 U2.16
  other v1: 5614,2828
  other v2: 6234,3256
D8: NU1.64 U2.29 U4.36 | length 5004.2
  Top Layer w8: NU1.64@3625,3207 3625,4124 3693,4192 6182,4192 6291,4083 6291,3258 6264,3231 v2@6235,3231 ; 6103,2951 6151,2951 v2@6156,2956
  Bottom Layer w8: v1@5616.56,3213.44 U2.29 ; v2@6157,2957 6157,3149 6174.5,3166.5 v2@6239,3231
  other v1: 5616,3214
  other v2: 6158,2956 6236,3231
D9: NU1.65 U2.30 U4.38 | length 5103.7
  Top Layer w8: NU1.65@3606,3212.01 3606,4135 3686,4215 6201,4215 6322,4094 6322,3225 6307,3210 6293,3210 ; U4.38@6100,2996 v2@6185,2996 ; v2@6241,3209 6295,3209
  Bottom Layer w8: v1@5648.05,3204.05 U2.30 ; v2@6181,2996 6181,3146 v2@6242,3207
  other v1: 5646,3206
  other v2: 6184,2996 6240,3209
D10: NU1.66 U2.31 U4.40 | length 5226.7
  Top Layer w8: NU1.66@3585,3204 3585,4151 3682,4248 6214,4248 6346,4116 6346,3207 6324,3185 6303,3185 ; U4.40@6098,3036 6217,3036 v2@6221,3032 ; v2@6245,3188 6246,3187 6305,3187
  Bottom Layer w8: v1@5679.55,3194.55 U2.31 ; v2@6219,3032 6219,3160 v2@6246,3187
  other v1: 5681,3196
  other v2: 6220,3028 6248,3187
D11: NU1.67 U2.32 U4.42 | length 5269.1
  Top Layer w8: NU1.67@3563,3216 3563,4157 3674,4268 6223,4268 6374,4117 6374,3200 6334,3160 v2(6249,3160) ; U4.42@6098,3073 6240,3073
  Bottom Layer w8: v1@5711.05,3180.05 U2.32 ; v2@6247,3077 v2@6247,3159
  other v1: 5711,3184
  other v2: 6247,3076
D12: NU1.68 U2.35 U4.45 | length 5336.3
  Top Layer w8: NU1.68@3544,3204 3544,4174 3664,4294 6231,4294 6401,4124 6401,3199 6332,3130 U4.45@6101,3130
  Bottom Layer w8: v1@5805.54,3170.46 U2.35
  other v1: 5806,3174
D13: NU1.77 U2.36 U4.47 | length 4255.5
  Top Layer w8: v2@3231,3040 NU1.77@3356,3040
  Bottom Layer w8: v2@3231,3039 3231,3235 4193,4197 5655,4197 5844,4008 5844,3351 5835,3342 U2.36@5835,3302 ; v1@5837.03,3171.03 U2.36
  other v1: 5835,3171
  other v2: 3230,3039
D14: NU1.78 U2.37 U4.49 | length 4222.7
  Top Layer w8: v2@3213,3021 NU1.78@3350,3021
  Bottom Layer w8: v2@3210,3022 3210,3249 4190,4229 5664,4229 5872,4021 5872,3582 5869,3579 5869,3324 U2.37@5870,3323 ; U2.37@5865,3302.54 U2.37
  other v2: 3213,3019
D15: NU1.79 U2.38 U4.51 | length 4454.1
  Top Layer w8: v2@3195,2999 NU1.79@3344,2999
  Bottom Layer w8: v2(3197,2999) 3189,3007 3189,3265 4176,4252 5684,4252 5901,4035 5901,3581 ; 5900.02,3195.98 U2.38 ; U2.38@5901,3319 5901,3580
GND: C4.2 C5.1 C6.1 C7.1 C8.2 C9.2 C10.2 C11.2 C12.2 C13.1 C14.1 C15.1 C16.1 C17.1 C18.1 C19.1 C20.1 C21.2 C22.2 C23.2 C24.2 C25.1 C26.1 C27.1 D4.2 J1.2 J1.3 NU1.16 NU1.30 NU1.31 NU1.38 NU1.51 NU1.61 NU1.71 NU1.83 NU1.94 NU1.107 NU1.120 NU1.130 NU1.143 P3.2 P6.1 P7.3 P8.4 P8.6 P8.8 P8.10 P8.12 P8.14 P8.16 P8.18 P8.20 P20.4 R7.2 R22.2 R23.2 R24.2 R25.2 REST1.1 U1.15 U2.12 U2.34 U3.1 U4.33 U4.52 U5.13 U5.36 | length 121
  Top Layer w10: R25.2@3423,1947 R24.2@3544,1947
LED0: NU1.19 R1.1
LED1: NU1.20 R2.1
LED2: NU1.21 R3.1
NetC1_1: C1.1 U1.1
NetC1_2: C1.2 U1.3
NetC2_2: C2.2 U1.2
NetC3_1: C3.1 U1.5
NetC3_2: C3.2 U1.4
NetC4_1: C4.1 U1.6
NetC24_1: C24.1 R14.2 U4.14 | length 1618.5
  Top Layer w8: C24.1 4495,1943 5329,2777 v1@5329,2784
  Bottom Layer w8: v1@5310,3095 5327,3078 v1(5327,2785)
  other v1: 5312,3092
NetD1_2: D1.2 R1.2
NetD2_2: D2.2 R2.2
NetD3_2: D3.2 R3.2
NetD4_1: D4.1 R6.1
NetL1_1: L1.1 NU1.32 NU1.33
NetP5_2: P5.2 U5.7 | length 3801.7
  Top Layer w8: P5.2 3073,2429 3073,1685 3329,1429 5230,1429 5655.11,1854.11 U5.7
NetP6_2: P6.2 R15.2 U4.16
NetP8_11: P8.11 R23.1 | length 247.1
  Bottom Layer w20: R23.1@3790,1869 3790,1653 P8.11@3812,1631
NetP8_17: P8.17 R24.1 | length 237.9
  Top Layer w20: P8.17@3500,1636 3548,1684 R24.1@3548,1854
NetP8_19: P8.19 R25.1 | length 224
  Top Layer w20: P8.19@3418,1627 R25.1@3418,1851
NetP20_2: P20.2 R4.1
NetP20_3: P20.3 R5.1
NetR7_1: R7.1 R8.2 U5.19 | length 303.1
  Top Layer w8: U5.19 5891.33,1868.33 5827,1804 R8.2 5945,1769 R7.1
NetR10_1: R10.1 U4.53 | length 307
  Top Layer w8: U4.53 6146.94,3289.95 6167,3310 6167,3503 R10.1@6146,3524
NRST: C27.2 NU1.25 P8.15 R16.1 REST1.2 | length 834.3
  Top Layer w8: NU1.25@4265,2904 4298,2904 4335,2941 4335,3346 C27.2@4413,3424
  Top Layer w20: R16.1@4286,3418 4406,3418 C27.2@4410,3414 ; C27.2@4429,3419 REST1.2@4537,3419
OSCIN: C25.2 NU1.23 Y2.2 | length 328.9
  Top Layer w8: NU1.23@4273,2861 4366,2861 Y2.2@4431,2926
  Bottom Layer w8: Y2.2@4446,2932 Y2.2@4452,2938
  Bottom Layer w20: Y2.2@4441,2935 4505,2999 C25.2@4550,2999
OSCOUT: C26.2 NU1.24 Y2.1 | length 480.4
  Top Layer w10: NU1.24@4277,2883 4321,2883 4374,2936 4374,3090 Y2.1@4429,3145
  Bottom Layer w10: Y2.1@4452,3149 4481,3120 C26.2@4564,3120 ; Y2.1@4459,3141 Y2.1@4463,3137
PA0: NU1.34
PA1: NU1.35
PA2: NU1.36
PA3: NU1.37
PA4: NU1.40
PA5: NU1.41 P1.1
PA6: NU1.42 P1.2
PA7: NU1.43 P1.3
PA8: NU1.100 P1.4
PA9: NU1.101 U1.11
PA10: NU1.102 U1.12
PA11: NU1.103 R4.2
PA12: NU1.104 R5.2
PA13: NU1.105 P8.7 R21.1 | length 2205.1
  Top Layer w10: NU1.105 3267.57,2489.57 3231,2453 3231,1594 3377,1448 3917,1448 3965,1496 3965,1581 P8.7
  Top Layer w20: P8.7@4016,1632 4016,1840 R21.1@4025,1849
PA14: NU1.109 P8.9 R20.1 R22.1 | length 1607.7
  Top Layer w8: NU1.109 3466.51,2140.51 3315,1989 3315,1623 3359,1579 3863,1579 P8.9
  Top Layer w20: P8.9@3915,1653 R20.1@3915,1846
PA15: NU1.110 P8.5 R19.1 | length 2039.1
  Top Layer w8: v1@3338,1662 3338,1975 3486.2,2123.2 NU1.110
  Top Layer w20: P8.5@4115,1633 4142,1660 R19.1@4142,1861
  Bottom Layer w8: v1(3339,1663) 3339,1514 3387,1466 4039,1466 4060,1487 4060,1576 P8.5
PB0: NU1.46
PB1: NU1.47
PB2: NU1.48
PB3: NU1.133 P8.13 | length 838
  Top Layer w8: v1@3826,2021 v1(3828,2021) 3853,2021 3938.95,2106.95 NU1.133
  Bottom Layer w8: P8.13 3713,1938 3796,2021 v1(3828,2021)
PB4: NU1.134 P8.3 R18.1 | length 1044.5
  Top Layer w8: NU1.134 3958.64,2110.36 3978,2091 4257,2091 4310,2038 4310,1898 R18.1
  Top Layer w20: P8.3@4212,1635 4246,1669 R18.1@4246,1850
PB5: NU1.135
PB6: NU1.136
PB7: NU1.137
PB8: NU1.139
PB9: NU1.140
PB10: NU1.69
PB11: NU1.70
PB12: NU1.73
PB13: NU1.74
PB14: C5.2 NU1.75 Y1.2
PB15: C6.2 NU1.76 Y1.1
PC0: NU1.26
PC1: NU1.27
PC2: NU1.28
PC3: NU1.29
PC4: NU1.44
PC5: NU1.45
PC6: NU1.96
PC7: NU1.97
PC8: NU1.98
PC9: NU1.99
PC10: NU1.111
PC11: NU1.112
PC12: NU1.113
PC13: NU1.7
PC14: NU1.8
PC15: NU1.9
PD2: NU1.116
PD3: NU1.117
PD4: NU1.118 U2.41 U4.34 U5.8 | length 2435.6
  Top Layer w8: v1@3643.68,2059.68 3643.68,2230.32 ; NU1.118 3643.68,2230.32 ; 3644,2230 3643.68,2230.32 ; v1(5403,2059) 5651,2059 5674.8,2035.2 U5.8
  Bottom Layer w8: v1(3643,2059) v1(5403,2059) 5409,2059
PD5: NU1.119 U2.17 U4.13 U5.18 | length 3876.4
  Top Layer w8: NU1.119 v1@3663.36,2508.36 ; v1(5047,3210) 5144.22,3112.78 U4.13 5580.78,3112.78 ; 5581,3113 5580.78,3112.78 ; v3(5583,2820) 5583,2798 5495,2710 5495,2460 5735,2220 5735,2083 5761,2057 5829,2057 5871.65,2014.36 U5.18 ; v1(5586,3111) 5584.22,3112.78 5580.78,3112.78
  Bottom Layer w8: v1(3664,2509) 3664,2571 3746,2653 4016,2653 4175,2812 4648,2812 v1@5048,3212 ; v3@5585.06,2823.06 U2.17 v1@5585.06,3111
PD6: NU1.122 P5.1 R13.2 U4.17 | length 3234.4
  Top Layer w8: R13.2@3679,1937 3679,2025 3724,2070 NU1.122@3724,2308 ; NU1.122 v1@3722.42,2591.58 ; U4.17 v1@5384.04,3034.04
  Bottom Layer w8: v1(3722,2589) 3751,2618 4033,2618 4193,2778 4655,2778 5143,3266 5143,3345 5304,3506 5369,3506 5386,3489 v1(5386,3036)
PD7: NU1.123 U5.9 | length 2350.5
  Top Layer w8: v1@3742.1,2185.9 NU1.123 ; v1@5687,2169 5694.48,2161.52 U5.9
  Bottom Layer w8: v1(3743,2190) 3762,2171 5281,2171 5282,2172 v1@5687,2172
  other v1: 5686,2169
PE0: NU1.141 U2.39 | length 3018.5
  Top Layer w8: NU1.141 v1@4096.43,2514.57 ; v1(5342,3469) 5342,3716 5368,3742 5667,3742 v1@5922,3487
  Bottom Layer w8: v1(4098,2513) 4288,2703 4693,2703 5183,3193 5183,3312 5339,3468 v1@5346,3468 ; v1(5921,3487) 5921,3431 5931.52,3420.48 U2.39
PE1: NU1.142 U2.40 | length 2957.7
  Top Layer w8: NU1.142 v1@4116.12,2476.12 ; v1(5357,3453) 5357,3704 5376,3723 5647,3723 v1@5955,3415
  Bottom Layer w8: v1(4116,2477) 4315,2676 4712,2676 5211,3175 5211,3306 v1@5360,3455 ; v1(5955,3412) 5963.02,3403.98 U2.40
PF6: NU1.18
PF10: NU1.22
PF11: NU1.49
PG6: NU1.91 P5.3 R12.1
PG7: NU1.92
PG8: NU1.93
PG9: NU1.124 R11.1 U4.32 | length 3158.9
  Top Layer w8: v1@3761.79,2207 NU1.124 NU1.124@3762,2338.2 ; U4.32 6227.56,2876.56 R11.1
  Bottom Layer w8: v1(3761,2207) 3782,2186 5804,2186 6152,2534 v1@6152,2875
  other v1: 6152,2877
PG10: NU1.125 R9.1 U2.6 | length 388.7
  Top Layer w8: NU1.125@3784,2318 3784,1959 R9.1@3805,1938
PG11: NU1.126
PG12: NU1.127
PG13: NU1.128
PG14: NU1.129
PG15: NU1.132
R1IN: P3.1 U1.13
T1OUT: P3.3 U1.14
"USB 5V": P20.1
VDD5: C2.1 C8.1 C9.1 C11.1 C13.2 J1.1 U1.16 U3.3
VDD33: C7.2 C10.1 C12.1 C14.2 C15.2 C16.2 C17.2 C18.2 C19.2 C20.2 C21.1 C22.1 C23.1 D1.1 D2.1 D3.1 L1.2 NU1.17 NU1.39 NU1.52 NU1.62 NU1.72 NU1.84 NU1.95 NU1.108 NU1.121 NU1.131 NU1.144 P7.1 P8.1 P8.2 R6.2 R8.1 R9.2 R10.2 R11.2 R12.2 R13.1 R14.1 R15.1 R16.2 R18.2 R19.2 R20.2 R21.2 U2.11 U2.33 U3.2 U4.29 U4.43 U5.12 U5.37 | length 614
  Top Layer w20: R13.1@3682,1862 3816,1862 3898,1944 R18.2@4262,1944
pads on no net: NU1.6 NU1.85 NU1.86 NU1.106 P20.5 P20.6 REST1.3 REST1.4 U1.7 U1.8 U1.9 U1.10 U4.1 U4.27 U4.28 U4.30 U4.55 U4.56 U5.1 U5.2 U5.3 U5.4 U5.5 U5.6 U5.10 U5.11 U5.14 U5.15 U5.20 U5.21 U5.22 U5.23 U5.24 U5.25 U5.26 U5.27 U5.28 U5.33 U5.34 U5.35 U5.38 U5.39 U5.40 U5.45 U5.46 U5.47 U5.48

## Keep-outs
Keep-Out Layer:
  lines w10: 6655,1390 1560,1390 1560,4605 1560,4865 1575,4880 6655,4880 ; 7031,1378 7031,4868

## Text inside footprints (layer, text, board x,y; h text height)
P8: Top Overlay "20" at 3353,1549 h35 r180; Top Overlay "19" at 3353,1649 h35 r180; Top Overlay "1" at 4413,1649 h35 r180; Top Overlay "2" at 4413,1549 h35 r180